# EAGLE board sapflow_v3 (EAGLE 9.5.2)
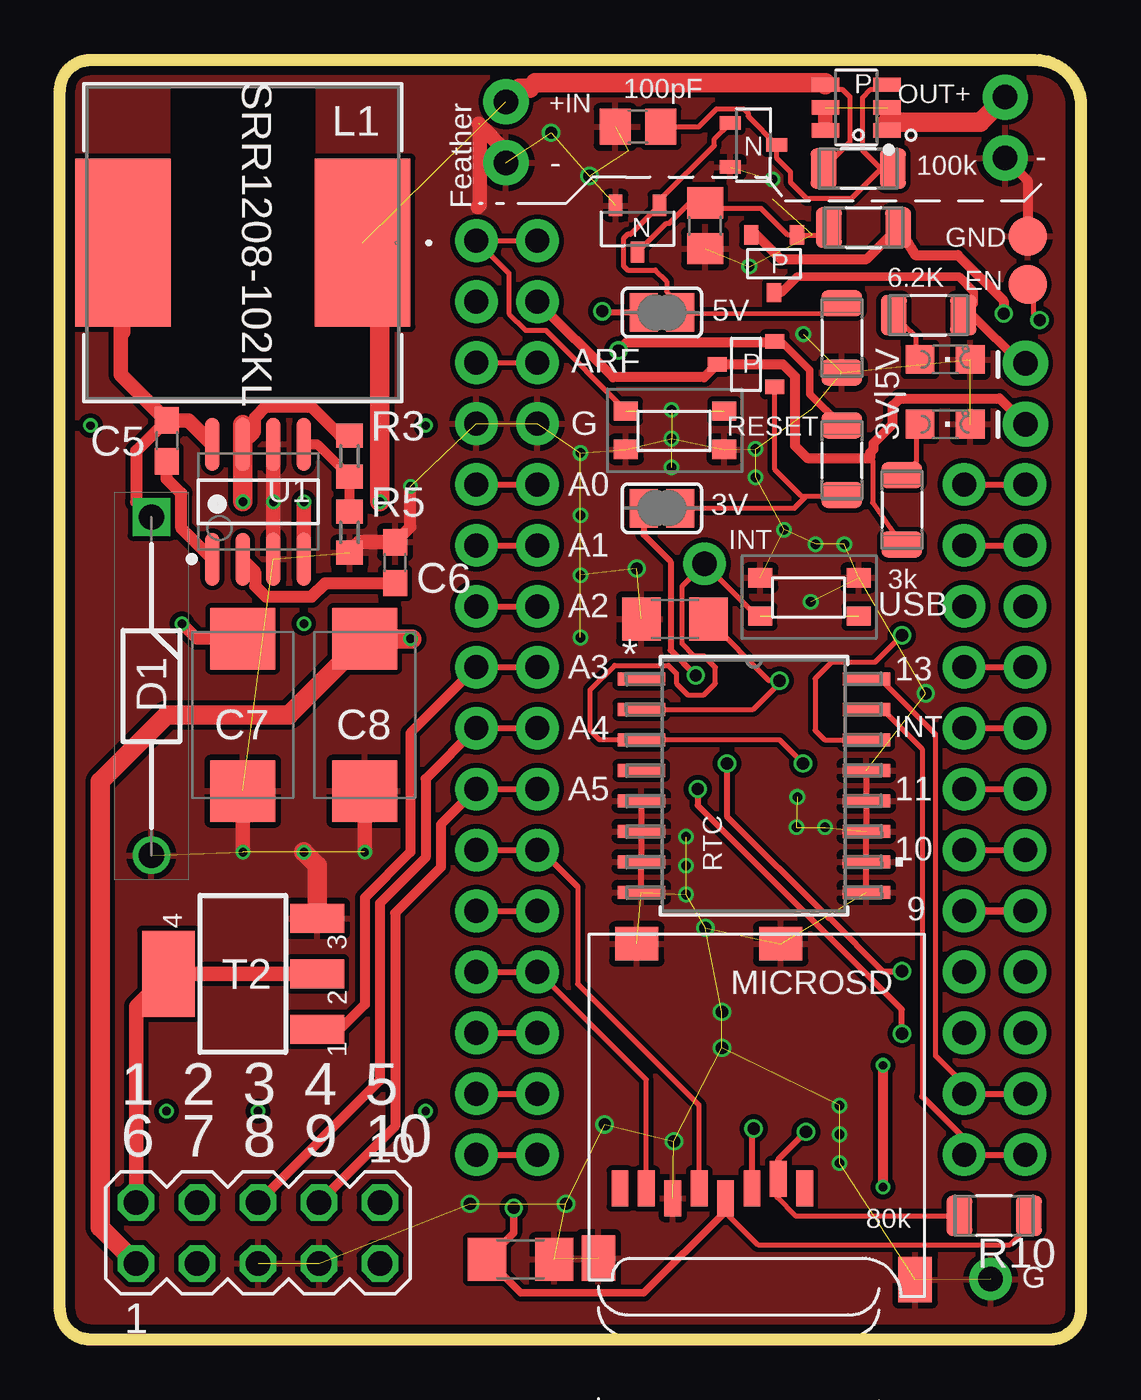
[diagram p0: board, top side]
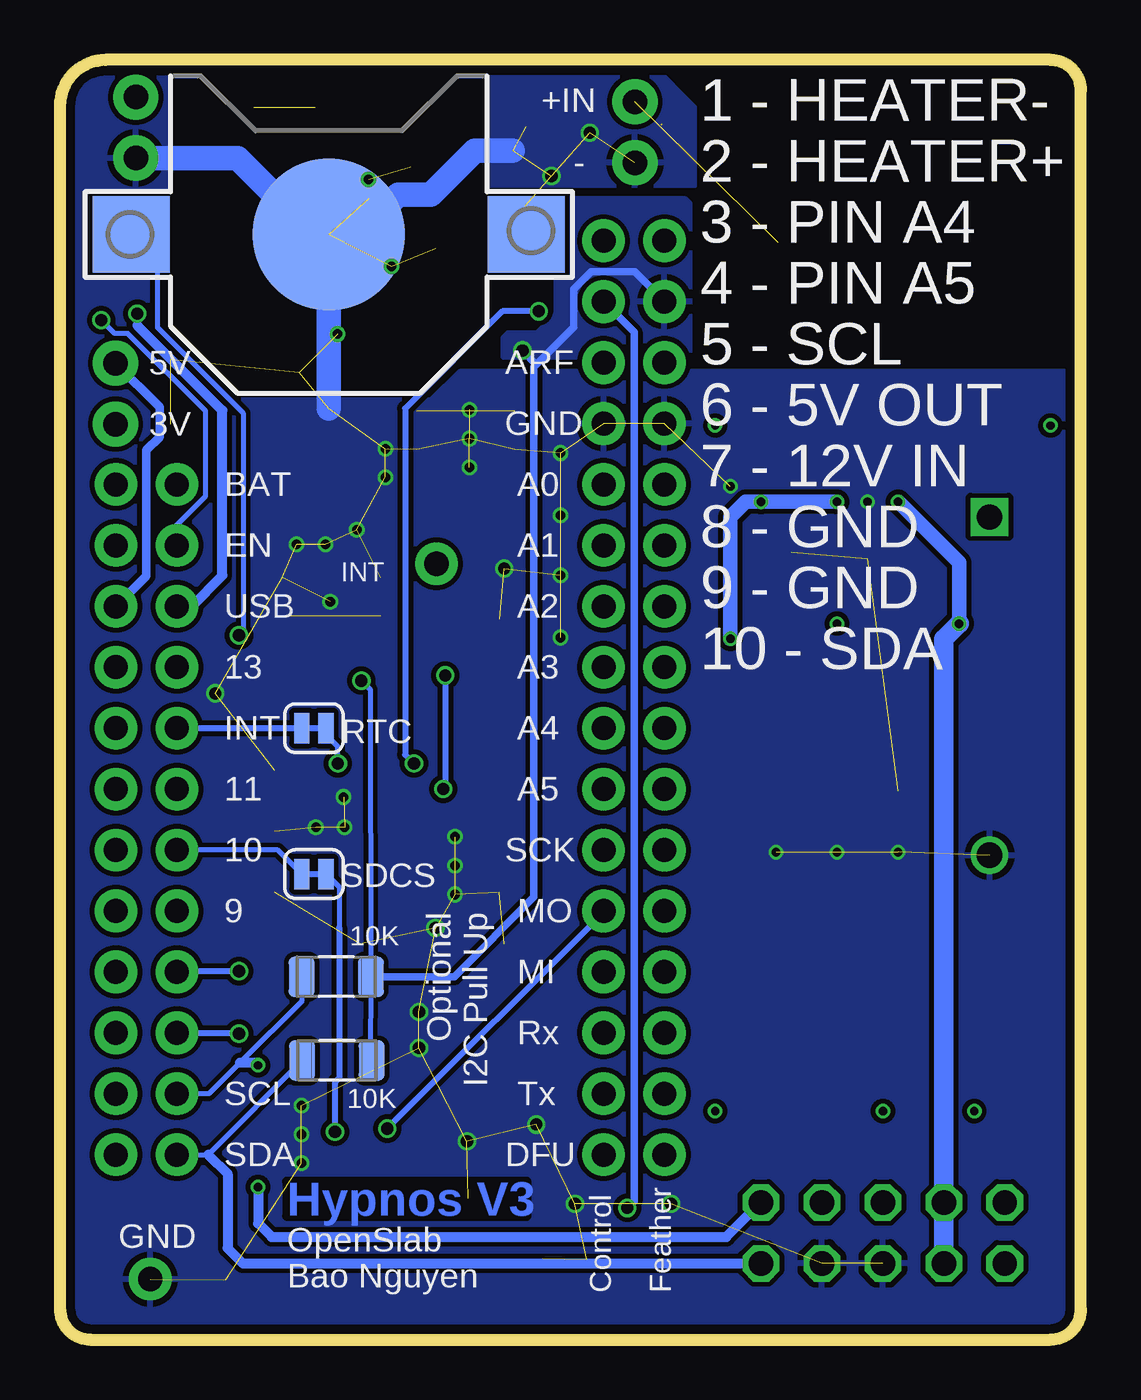
[diagram p1: board, bottom side, seen from below]

Size 42.55 x 53.34 mm. Coordinates in mm from the lower left corner, seen from the top.
Outline: 1.27,53.34 40.64,53.34 arc-90 42.55,51.44 42.55,1.27 arc-90 41.28,0 1.27,0 arc-90 0,1.27 0,52.07 arc-90 1.27,53.34
Copper layers (1*16): Top 0.035559375mm / dielectric 1.6mm / Bottom 0.035559375mm
Design rules "osh_park": minimum track width 6mil, minimum drill 10mil, track to track 6mil, track to pad 6mil, pad to pad 6mil, via to via 6mil, smd to smd 6mil, copper to edge 15mil, drill to drill 6mil, minimum pad ring 5mil, minimum via ring 5mil, stop-mask expansion 2.5mil, vias tented up to drill 0mil, thermal gap 10mil
Net classes: 0 default: clearance 0.205 mm; 1 GND: clearance 0.205 mm to class 0, clearance 0.205 mm; 2 HIGHVOLTAGE: clearance 0.205 mm to class 0, clearance 0.205 mm to class 1, clearance 0.3 mm

## Footprints (pad centres in the part's own frame; a part is rotated, then mirrored left to right if it is on the bottom)
SJ = smd 1.168 x 1.6: 1 -0.762,0; 2 0.762,0
1X02_NO_SILK = drill 1.016 pad 1.88: 1 0,0; 2 2.54,0
CR1220 = smd 3.2 x 3.2: +$1 -8.225,0; +$2 8.225,0 | smd 6.35 x 6.35: - 0,0
C1206 = smd 1.6 x 1.8: 1 -1.4,0; 2 1.4,0
C0805 = smd 1.3 x 1.5: 1 -0.95,0; 2 0.95,0
C0603 = smd 1.1 x 1: 1 -0.85,0; 2 0.85,0
D/7343-31R = smd 2.55 x 2.7: + 3.175,0; - -3.175,0
SMT-JUMPER_2_NC_TRACE_SILK = smd 0.635 x 1.27: 1 -0.508,0; 2 0.508,0
DIOAD1405W86L465D235 = drill 1.05 pad 1.575 square: 1 0,0 | drill 1.05 pad 1.575: 2 14.1,0
1X01-CLEANBIG = drill 1.016 pad 1.778: 1 0,0
IND_BOURNS_SRR1208 = smd 3.988 x 7.01: 1 -4.991,0; 2 4.991,0
CHIPLED_0805 = smd 1.2 x 1.2: A 0,-1.05; C 0,1.05
MICROSD = smd 0.7 x 1.5: 1 9,-10.64; 2 7.9,-10.24; 3 6.8,-10.64; 4 5.7,-11.04; 5 4.6,-10.64; 6 3.5,-11.04; 7 2.4,-10.64; 8 1.3,-10.64 | smd 1.8 x 1.4: CD1 2,-0.44; CD2 8,-0.44 | smd 1.4 x 1.9: MT1 0.4,-13.54; MT2 13.6,-14.44
FEATHERWING = drill 1 pad 1.778: 1 6.35,1.27; 2 8.89,1.27; 3 11.43,1.27; 4 13.97,1.27; 5 16.51,1.27; 6 19.05,1.27; 7 21.59,1.27; 8 24.13,1.27; 9 26.67,1.27; 10 29.21,1.27; 11 31.75,1.27; 12 34.29,1.27; 13 36.83,1.27; 14 39.37,1.27; 15 41.91,1.27; 16 44.45,1.27; 17 44.45,21.59; 18 41.91,21.59; 19 39.37,21.59; 20 36.83,21.59; 21 34.29,21.59; 22 31.75,21.59; 23 29.21,21.59; 24 26.67,21.59; 25 24.13,21.59; 26 21.59,21.59; 27 19.05,21.59; 28 16.51,21.59
SOT-23-3 = smd 0.8 x 0.6: D 1.2,0; G -1.2,0.95; S -1.2,-0.95
SOT23-6 = smd 1.146 x 0.597: 1 -1.287,0.95; 2 -1.287,0; 3 -1.287,-0.95; 4 1.287,-0.95; 5 1.287,0; 6 1.287,0.95
SOT23-S = smd 0.88 x 0.569: 1 -0.975,0.915; 2 -0.975,-0.915; 3 0.975,0
RES_1206 = smd 1.08 x 1.68: 1 -1.445,0; 2 1.445,0
R0603 = smd 1 x 1.1: 1 -0.85,0; 2 0.85,0
21-0042B_16 = smd 1.981 x 0.533: 1 -4.686,4.445; 2 -4.686,3.175; 3 -4.686,1.905; 4 -4.686,0.635; 5 -4.686,-0.635; 6 -4.686,-1.905; 7 -4.686,-3.175; 8 -4.686,-4.445; 9 4.686,-4.445; 10 4.686,-3.175; 11 4.686,-1.905; 12 4.686,-0.635; 13 4.686,0.635; 14 4.686,1.905; 15 4.686,3.175; 16 4.686,4.445
MA05-2 = drill 1.016 octagon: 1 -5.08,-1.27; 2 -5.08,1.27; 3 -2.54,-1.27; 4 -2.54,1.27; 5 0,-1.27; 6 0,1.27; 7 2.54,-1.27; 8 2.54,1.27; 9 5.08,-1.27; 10 5.08,1.27
SOT223 = smd 1.219 x 2.235: 1 -2.311,-3.099; 2 0,-3.099; 3 2.311,-3.099 | smd 3.6 x 2.2: 4 0,3.099
TP16R = smd 1.6 x 1.6: TP 0,0
MAXIM_MAX5033BASA+_1 = smd 2.2 x 0.6: 1 -2.4,1.905; 2 -2.4,0.635; 3 -2.4,-0.635; 4 -2.4,-1.905; 5 2.4,-1.905; 6 2.4,-0.635; 7 2.4,0.635; 8 2.4,1.905
PUSHBUTTON_SMD = smd 1 x 0.8: 1 0,-1.6; 2 4.1,-1.6; 3 0,0; 4 4.1,0

## Placement (x,y rotation side)
3V  [SJ]  25.09,34.66 0 top
3V|5V  [1X02_NO_SILK]  40.23,38.16 90 bottom
5V  [SJ]  25.09,42.82 0 top
+IN  HIGHV-IN  [1X02_NO_SILK]  18.59,49.05 90 top
B1  CR1220  [CR1220]  31.34,46.07 0 bottom
C1  100nF  [C1206]  19.2,3.34 0 top
C2  100pF  [C0805]  26.88,46.43 270 top
C3  100nF  [C1206]  25.62,30.04 180 top
C4  100pF  [C0805]  24.09,50.55 180 top
C5  1uF  [C0603]  4.45,37.47 270 top
C6  0.1uF  [C0603]  13.97,32.39 90 top
C7  47uF  [D/7343-31R]  7.62,26.04 90 top
C8  33uF  [D/7343-31R]  12.7,26.04 90 top
CS  SD Select  [SMT-JUMPER_2_NC_TRACE_SILK]  31.97,19.4 0 bottom
D1  VS-50SQ100  [DIOAD1405W86L465D235]  3.81,34.29 270 top
INT  [1X01-CLEANBIG]  26.86,32.34 0 top
JP1  [1X01-CLEANBIG]  38.78,2.52 0 top
L1  SRR1208-102KL  [IND_BOURNS_SRR1208]  7.62,45.72 180 top
LED1  RED  [CHIPLED_0805]  36.88,40.86 270 top
LED2  RED  [CHIPLED_0805]  36.88,38.16 270 top
MICROSD  MICROSD  [MICROSD]  22.04,16.93 0 top
MS1  FEATHERWING  [FEATHERWING]  18.62,52.16 270 top
MS2  FEATHERWING  [FEATHERWING]  16.09,52.16 270 top
OUT+  HIGHV-OUT  [1X02_NO_SILK]  39.38,49.26 90 top
PMOS1  SSM3J3228R  [SOT-23-3]  29.76,44.85 270 top
PMOS2  SSM3J3228R  [SOT-23-3]  28.59,40.66 180 top
PMOS3  P-MOSFET  [SOT23-6]  33.19,51.36 180 top
Q1  NMOS  [SOT23-S]  24.07,46.3 270 top
Q2  NMOS  [SOT23-S]  28.9,49.8 0 top
R1  30k  [RES_1206]  32.59,41.76 270 top
R2  30k  [RES_1206]  32.59,36.66 90 top
R3  1M  [R0603]  12.07,36.83 90 top
R4  100k  [RES_1206]  33.48,46.36 0 top
R5  384k  [R0603]  12.07,33.66 90 top
R6  10k  [RES_1206]  31.01,11.64 180 bottom
R7  10k  [RES_1206]  31.04,15.12 180 bottom
R8  2k  [RES_1206]  36.2,42.71 0 top
R9  820  [RES_1206]  35.09,34.59 270 top
R10  30k  [RES_1206]  38.93,5.17 180 top
R11  100k  [RES_1206]  33.27,48.81 180 top
RTC  DS3231ST&R  [21-0042B_16]  28.92,23.09 0 top
RTC_INT  [SMT-JUMPER_2_NC_TRACE_SILK]  31.97,25.48 0 bottom
SV1  [MA05-2]  8.26,4.45 0 top
T2  [SOT223]  7.62,15.24 90 top
TP1  TPTP16R  [TP16R]  40.33,43.98 0 top
TP2  TPTP16R  [TP16R]  40.33,45.98 0 top
U1  MAXIM_MAX5033BASA+MAXIM_MAX5033BASA+_0_1  [MAXIM_MAX5033BASA+_1]  8.26,34.93 90 top
U$1  PUSH_BUTTON  [PUSHBUTTON_SMD]  23.59,38.71 0 top
U$2  PUSH_BUTTON  [PUSHBUTTON_SMD]  29.19,31.75 0 top

## Library data of the parts
3V 5V = jumper
3V|5V +IN OUT+ = SparkFun-Connectors
B1 = microbuilder
C1 C3 INT JP1 LED1 LED2 MICROSD MS2 = adafruit
C2 C4 = resistor
C5-C8 = rcl; SPICEPREFIX: C
CS RTC_INT = SparkFun-Jumpers
D1 = VS-50SQ100; ALLIED_NUMBER: 70078786; ALLIED_PRICE-STOCK: http://www.alliedelec.com/vishay-pcs-vs-50sq100/70078786/; DESCRIPTION: VS-50SQ100, Schottky Diode, 5A max, 100V, 2-Pin, DO-204AR; HEIGHT: mm; MANUFACTURER_NAME: Vishay; MANUFACTURER_PART_NUMBER: VS-50SQ100; MOUSER_PART_NUMBER: 844-50SQ100; MOUSER_PRICE-STOCK: https://www.mouser.com/Search/Refine.aspx?Keyword=844-50SQ100; RS_PART_NUMBER: 5446041; RS_PRICE-STOCK: https://uk.rs-online.com/web/p/products/5446041
L1 = SRR1208-102KL; BUILT_BY: EMA_UL_Team; MANUFACTURER_PART_NUMBER: SRR1208-102KL; VENDOR: Bourns Electronics
MS1 = powerboard
PMOS1 PMOS2 = M0_Power
PMOS3 Q1 Q2 U$1 U$2 = eDNA
R1 R2 R4 R6-R11 = Resistor_Capacitor; CREATED_BY: PCBLayout.com; DIGIKEY_PART_NUMBER: WSLP-.05TR-ND; MANUFACTURER: Vishay Dale; MPN: WSLP1206R0500FEA; PACKAGE: SMD 1206
R3 R5 = rcl; SPICEPREFIX: R
RTC = power8; MANUFACTURER_PART_NUMBER: DS3231S#T&R; VENDOR: Maxim Integrated Products
SV1 = con-lstb; OC_FARNELL: unknown; OC_NEWARK: unknown
T2 = zetex; OC_FARNELL: unknown; OC_NEWARK: unknown
TP1 TP2 = testpad
U1 = Maxim - MAX5033BASA+; CIIVA_IDS: 1484514; CODE__IPC: SOIC127P600-8; CODE__JEDEC: MS-012-AA; COMPONENT_LINK_1_DESCRIPTION: Manufacturer URL; COMPONENT_LINK_1_URL: http://www.maxim-ic.com; COMPONENT_LINK_3_DESCRIPTION: Package Specification; COMPONENT_LINK_3_URL: http://pdfserv.maxim-ic.com/package_dwgs/21-0041.PDF; DATASHEET: http://datasheets.maxim-ic.com/en/ds/MAX5033.pdf; DATASHEET_VERSION: Rev 5, May-2011; FOOTPRINT_VARIANT_NAME_0: Level C; FOOTPRINT_VARIANT_NAME_1: Level B; FOOTPRINT_VARIANT_NAME_2: Level A; IMPORTED: yes; IMPORTED_FROM: vault; IMPORT_TS: 1521862065; MF: Maxim; MPN: MAX5033BASA+; PACKAGE: S8+5; PACKAGE_DESCRIPTION: 8-Pin Small-Outline IC, Narrow (0.15in), 1.27 mm Pitch, SOIC (N), Pb-Free; PACKAGE_VERSION: revC, 2010; PREFIX: U; RELEASE_DATE: 1332919945; VAULT_GUID: 1E7CABE1-80B5-44B1-A1B1-D79A0DB0D6E1; VAULT_REVISION: 223A1D72-BB07-4F7F-9695-43D469E578B1

## Nets
0RX: MS1.14 MS2.14
1TX: MS1.15 MS2.15
3VRAIL: 3V|5V.1 C1.1 MICROSD.4 MS1.2 PMOS2.D R9.2 R10.1
5VRAIL: 3V|5V.2 MS1.26 PMOS1.D R8.2
5VUSB: MS2.26 PMOS1.S R4.2
9: MS1.21 MS2.21
11: MS1.23 MS2.23
13: MS1.25 MS2.25
+3V3: C3.1 MS2.2 PMOS2.S R2.2 R6.1 R7.1 RTC.2
+12V: C7.+ R3.2 SV1.3 SV1.4 U1.7
A0: MS1.5 MS2.5
A1: MS1.6 MS2.6
A2: MS1.7 MS2.7
A3: MS1.8 MS2.8 T2.1
A4: MS1.9 MS2.9 SV1.6
A5: MS1.10 MS2.10 SV1.8
ARF: MS1.3 MS2.3
CLK: MICROSD.5 MS1.11 MS2.11
CS: CS.2 MICROSD.2 R10.2
DFU: MS1.16 MS2.16
DI: MICROSD.3 MS1.12 MS2.12
DO: MICROSD.7 MS1.13 MS2.13
EN: MS1.27 MS2.27 TP1.TP
GND [GND]: +IN.1 B1.- C1.2 C2.2 C3.2 C4.2 C6.2 C7.- C8.- D1.2 JP1.1 LED1.C LED2.C MICROSD.6 MICROSD.CD1 MICROSD.CD2 MICROSD.MT1 MICROSD.MT2 MS1.4 MS2.4 OUT+.1 Q1.2 Q2.2 R1.2 R5.1 RTC.5 RTC.6 RTC.7 RTC.8 RTC.9 RTC.10 RTC.11 RTC.12 RTC.13 SV1.5 SV1.7 T2.3 TP2.TP U1.3 U1.6 U$1.1 U$1.2 U$2.3 U$2.4
HEATER-: SV1.2 T2.2 T2.4
HIGHVOLTAGE [HIGHVOLTAGE]: +IN.2 C8.+ L1.1 PMOS3.4 R11.2 SV1.1 U1.4
HIGHVRAIL [HIGHVOLTAGE]: OUT+.2 PMOS3.1 PMOS3.2 PMOS3.5 PMOS3.6
N$1: 5V.1 MS2.20
N$2: B1.+$1 RTC.14
N$3: 3V.1 MS2.19
N$4: 5V.2 Q1.1 Q2.1 R1.1
N$5: 3V.2 PMOS2.G R2.1
N$6: C6.1 U1.2
N$7: MS1.20
N$8: MS1.19
N$9: R3.1 R5.2 U1.5
N$10: C2.1 PMOS1.G Q1.3 R4.1
N$11: CS.1 MS1.22 MS2.22
N$12: LED1.A R8.1
N$13: LED2.A R9.1
N$14: MS1.24 MS2.24 RTC_INT.1
N$15: C4.1 PMOS3.3 Q2.3 R11.1
N$16: C5.2 U1.1
N$17: C5.1 D1.1 L1.2 U1.8
RESET: MS1.1 MS2.1 U$1.3 U$1.4
RTC_INT: INT.1 RTC.3 RTC_INT.2 U$2.1 U$2.2
SCL: MS1.18 MS2.18 R7.2 RTC.16 SV1.10
SDA: MS1.17 MS2.17 R6.2 RTC.15 SV1.9
VBATT: MS1.28 MS2.28

## Tracks (layer width: path | path; a pad name or v marks a point on that pad's centre or on a via)
0RX
  Top 0.254: MS2.14 MS1.14
1TX
  Top 0.254: MS2.15 MS1.15
3VRAIL  (via drill 0.51)
  Top 0.203: R9.2 33.86,34.88 33.86,36.64 33.76,36.75 | MICROSD.4 27.68,5.84 27.68,5.35 29.08,3.95 39.59,3.95 40.35,4.71 R10.1
  Top 0.254: MICROSD.4 27.72,5.92 27.72,5.33
  Top 0.305: 27.72,5.33 24.33,1.94 19.2,1.94 C1.1 18.91,4.45 v18.91,5.49
  Top 0.406: 3V|5V.1 39.16,39.23 34.99,39.23 34.7,38.94 34.7,38.16 33.89,37.35 33.89,37.11 33.76,36.97 33.76,36.75 31.13,36.75 30.63,37.26 30.63,40.15 30.12,40.66 PMOS2.D 26.84,40.11 23.05,40.11 MS1.2
  Bottom 0.305: MS1.2 18.62,41.99 18.62,5.77 v18.91,5.49
5VRAIL
  Top 0.305: 38.09,43.17 R8.2 | PMOS1.D 30.06,43.65
  Top 0.355: 38.09,43.17 38.09,43.69 37.47,44.3 30.72,44.3 30.06,43.65 | 3V|5V.2 40.03,40.7 38.02,42.71 R8.2
  Bottom 0.355: 3V|5V.2 38.4,38.86 38.4,37.62 38.95,37.07 38.95,31.83 MS1.26
5VUSB  (via drill 0.51)
  Top 0.406: v39.33,42.77 39.33,43.3 37.42,45.21 35.63,45.21 R4.2 33.61,45.04 30.04,45.04 29.03,46.05 PMOS1.S
  Bottom 0.305: 39.33,42.28 v39.33,42.77
  Bottom 0.406: MS2.26 37.06,30.57 35.78,31.85 35.78,38.73 39.33,42.28
9
  Top 0.305: MS2.21 MS1.21
11
  Top 0.254: MS2.23 MS1.23
13
  Top 0.254: MS2.25 MS1.25
+3V3  (via drill 0.51)
  Top 0.203: C3.1 27.02,29.98 29.55,27.46 v29.98,27.46 29.98,27.36 28.88,26.26 RTC.2
  Top 0.305: 29.73,41.55 PMOS2.S 30.06,41.61 31.25,40.41 31.25,39.41 R2.2
  Top 0.406: 29.73,41.55 23.59,41.55 v23.27,41.23
  Bottom 0.203: R6.1 29.61,11.66 R7.1 29.61,27.09 v29.98,27.46
  Bottom 0.305: R7.1 26.12,15.12 22.8,18.45 22.8,40.55 22.69,40.65 | 22.69,40.65 v23.27,41.23 | 22.69,40.65 21.14,42.2 21.14,43.78 20.41,44.51 18.6,44.51 MS2.2
  pour Bottom: 16.29,40.96 16.29,47.36 16.48,47.55 21.89,47.55 21.89,42.76 22.69,41.96 23.89,41.96 24.09,41.76 24.09,40.96
+12V  (via drill 0.35)
  Top 0.508: C7.+ 5.72,29.21 v5.08,29.85 | U1.7 8.13,37.84 8.13,38.44 8.58,38.88 10.47,38.88 11.68,37.68 R3.2
  Top 0.61: U1.7 7.62,38.1
  Top 0.813: 7.62,38.14 U1.7 v7.62,34.93
  Bottom 0.61: v5.08,29.85 5.08,32.39 v7.62,34.93
  Bottom 0.813: SV1.3 SV1.4 5.72,29.21 v5.08,29.85
A0
  Top 0.254: MS2.5 MS1.5
A1
  Top 0.254: MS2.6 MS1.6
A2
  Top 0.254: MS2.7 MS1.7
A3
  Top 0.254: MS2.8 MS1.8
  Top 0.406: MS2.8 14.61,25.27 14.61,20.32 12.7,18.41 12.7,13.97 11.66,12.93 T2.1
A4
  Top 0.254: MS2.9 MS1.9
  Top 0.406: MS2.9 15.24,23.37 15.24,20.09 13.34,18.18 13.34,10.8 SV1.6
A5
  Top 0.254: MS2.10 MS1.10
  Top 0.406: MS2.10 15.88,21.46 15.88,19.68 13.97,17.78 13.97,8.89 SV1.8
ARF
  Top 0.203: MS2.3 MS1.3
CLK
  Top 0.203: MICROSD.5 26.63,9.75 21.57,14.82 21.57,18.87
  Top 0.254: 21.57,18.87 20.04,20.4 MS1.11 MS2.11
CS  (via drill 0.51)
  Top 0.203: MICROSD.2 29.88,6.64 29.88,5.92 30.63,5.17 R10.2
  Top 0.254: v31.09,8.66 29.94,7.5 MICROSD.2
  Bottom 0.203: CS.2 30.91,18.86 30.91,17.18
  Bottom 0.254: v31.09,8.66 31.09,10.73 30.91,10.91 30.91,17.18
DFU
  Top 0.254: MS2.16 MS1.16
DI  (via drill 0.51)
  Top 0.254: v28.91,8.8 28.84,8.73 MICROSD.3 | MS2.12 MS1.12
  Bottom 0.254: v28.91,8.8 19.9,17.8 MS1.12
DO
  Top 0.203: MS1.13 19.94,15.32 | MICROSD.7 24.44,10.82 20.09,15.16
  Top 0.254: MS2.13 19.94,15.32 20.09,15.16
EN  (via drill 0.51)
  Top 0.203: v40.82,42.5 40.57,42.75 40.57,43.49 40.29,43.77 40.29,43.98 TP1.TP
  Top 0.254: MS2.27 MS1.27
  Bottom 0.203: v40.82,42.5 40.26,41.94 39.72,41.94 36.48,38.7 36.48,35.15 37.68,33.96 MS2.27
GND  (via drill 0.35, 0.4, 0.51)  (69 unrouted)
  Top 0.254: RTC.8 RTC.7 RTC.6 RTC.5 | RTC.9 RTC.10 RTC.11 RTC.12 RTC.13
  Top 0.406: OUT+.1 40.33,48.32 TP2.TP
  Top 0.508: C6.2 14.61,33.87 v14.61,35.56
  Top 0.61: R5.1 12.5,33.23 C6.2 | C7.- v7.62,20.32 | C8.- v12.7,20.32 | +IN.1 18.59,49.55 17.44,50.69 | 17.41,47.2 17.49,47.29 17.49,50.64 | U1.6 v8.89,34.93 U1.3
  Top 0.813: T2.3 10.72,19.76 v10.16,20.32
  Bottom 0.406: v29.69,48.36 29.69,47.55
  Bottom 0.813: 30.09,47.32 B1.- 31.95,46.07
  Bottom 1.016: B1.- 31.34,38.82 | 30.09,47.32 29.24,47.32 29.05,47.12 28.45,47.72 27.1,47.72 25.26,49.55 23.69,49.55 | 31.95,46.07 35.13,49.26 OUT+.1
  other vias: 25.59,8.27 30.73,22.61 30.18,33.76 26.9,17.15 20.47,50.3 36.08,26.93 22.7,8.96 27.59,13.65 21.09,5.66 17.09,5.66 24.04,32.14 27.59,12.16 28.98,37.12 28.98,35.95 28.73,44.73 25.48,38.76 25.48,37.55 25.48,36.36 30.69,21.36 31.88,21.36 31.48,33.16 32.69,33.16 31.29,30.75 26.09,20.95 26.09,19.75 26.09,18.55 32.48,9.75 32.48,8.55 32.48,7.35 30.98,41.92 22.07,48.51 21.69,34.36 21.69,36.96 21.69,31.86 21.69,29.26
  pour Top: 0.35,53.16 42.09,53.16 42.09,0.16 0.35,0.16
  pour Bottom: 0.11,40.36 25.88,40.36 27.09,39.16 35.09,39.16 38.09,42.16 38.09,52.66 42.09,52.66 42.09,0.16 0.11,0.16
  pour Bottom: 16.09,48.12 16.09,51.36 17.89,53.16 24.48,53.16 24.69,52.96 24.69,48.16 24.65,48.12
HEATER-
  Top 0.61: T2.4 T2.2 | T2.4 4.52,13.89 | SV1.2 3.18,13.89 T2.4
HIGHVOLTAGE  (via drill 0.35)  (1 unrouted)
  Top 0.203: PMOS3.4 32.08,52.12 32.61,52.12 32.91,51.82 32.91,49.92 31.85,48.86 R11.2
  Top 0.61: C8.+ 13.34,29.85 | U1.4 v10.16,34.93
  Top 0.813: +IN.2 19.15,52.16 19.57,52.16 19.81,52.4 31.9,52.4 PMOS3.4 | L1.1 13.34,45 v13.34,34.93 | 14.66,29.21 v14.61,29.21 C8.+ 9.53,26.04 4.45,26.04 1.68,23.27 1.68,4.67 SV1.1
  Bottom 0.61: v14.61,29.21 14.61,34.29 13.97,34.93 v13.34,34.93 v10.16,34.93
HIGHVRAIL  (1 unrouted)
  Top 0.61: PMOS3.1 34.47,50.76 PMOS3.2 34.52,51.31 | PMOS3.5 PMOS3.6
  Top 0.813: OUT+.2 38.34,50.76 34.47,50.76
N$1  (via drill 0.51)
  Top 0.254: v35.09,15.36 34.29,15.36 32.07,17.57 32.04,17.57 27.8,21.81 v27.8,24.02 | 5V.1 22.65,42.82 v22.6,42.86
  Bottom 0.254: v22.6,42.86 24.11,42.86 28.16,38.81 28.16,24.38 v27.8,24.02 | v35.09,15.36 37.65,15.36 MS2.20
N$2  (via drill 0.51)
  Top 0.203: RTC.14 31.87,24.99 31.47,25.39 31.47,27.55 32.15,28.23 33.96,28.23 v35.09,29.36
  Bottom 0.203: v35.09,29.36 34.91,29.53 34.91,38.62 38.49,42.2 38.49,44.98 B1.+$1
N$3  (via drill 0.51)
  Top 0.254: 3V.1 24.32,33.55 25.45,32.43 25.45,28.73 v26.49,27.68 | v35.09,12.75 35.09,13.75 26.58,22.27 v26.58,22.95
  Bottom 0.254: v26.49,27.68 26.49,23.04 v26.58,22.95 | v35.09,12.75 37.65,12.75 MS2.19
N$4
  Top 0.203: R1.1 32.59,43.17 32.18,42.76 25.92,42.74 5V.2 25.8,42.87 25.8,43.17 25.28,43.69 25.28,44.11 24.81,44.58 23.65,44.58 23.48,44.76 23.48,45.89 23.65,46.07 23.78,46.07 Q1.1 24.98,47.49 27.27,49.78 27.27,50.05 Q2.1
N$5
  Top 0.203: 31.11,35.16 30.9,35.16 29.79,36.27 PMOS2.G | 31.11,35.16 32.51,35.16 R2.1 | 31.11,35.16 30.61,34.66 3V.2
N$6
  Top 0.508: U1.2 8.13,32.01 8.13,31.41 8.58,30.97 10.47,30.97 11.04,31.54 C6.1
N$9
  Top 0.406: U1.5 10.72,37.33 R3.1 R5.2
N$10
  Top 0.203: R4.1 32.18,46.05 PMOS1.G 30.34,46.05 29.23,47.15 27.12,47.15 26.9,47.37 | 26.9,47.37 C2.1 | Q1.3 25.27,46.53 25.39,46.53 26.23,47.37 26.9,47.37
N$11
  Top 0.254: MS2.22 MS1.22
  Bottom 0.203: CS.1 33.47,20.4 MS2.22
N$12
  Top 0.203: LED1.A 35.66,41.03 35.66,41.82 R8.1
N$13
  Top 0.203: R9.1 35.69,36.61 35.69,38.01 LED2.A
N$14
  Top 0.254: MS2.24 MS1.24
  Bottom 0.254: MS2.24 RTC_INT.1
N$15
  Top 0.203: PMOS3.3 34.27,52.1 33.77,52.1 33.45,51.78 33.45,49.57 34.2,48.81 R11.1 34.23,48.81 32.98,47.56 31.12,47.56 30.44,48.23 30.44,48.67 29.87,49.24 Q2.3 28.67,51 28.67,51.12 28.49,51.3 27.36,51.3 26.62,50.55 C4.1
N$16
  Top 0.508: U1.1 5.06,33.82 5.06,35.27 4.45,35.88 C5.2
N$17
  Top 0.508: C5.1 3.18,37.05 3.18,34.93 D1.1
  Top 0.61: U1.8 5.36,38.32 C5.1 2.54,40.22 2.54,41.91 | 2.54,41.91 2.54,43.18 | L1.2 2.63,42 2.54,41.91
N$18  (via drill 0.35)
  other vias: 8.26,9.52
N$19  (via drill 0.35)
  other vias: 10.16,29.85
N$20  (via drill 0.35)
  other vias: 1.27,38.1
N$21  (via drill 0.35)
  other vias: 15.24,38.1
N$22  (via drill 0.35)
  other vias: 15.24,9.52
N$23  (via drill 0.35)
  other vias: 4.45,9.52
RESET  (1 unrouted)
  Top 0.203: MS1.1 MS2.1 18.7,44.46 18.7,42.77 19.4,42.07 20.25,42.07 23.59,38.73 U$1.3
RTC_INT  (via drill 0.51)  (1 unrouted)
  Top 0.203: v30.97,24.02 29.99,24.99 RTC.3 22.49,24.99 22.09,25.39 22.09,27.09 23.11,28.11 25.35,28.11 25.68,27.77 25.68,27.35 26.16,26.87 26.83,26.87 27.31,27.35 27.31,28.02 26.83,28.5 26.43,28.5 25.92,29.01 25.92,31.4 INT.1 27.95,31.24 29.04,30.15 U$2.1 | 33.31,30.13 U$2.2
  Bottom 0.203: RTC_INT.2 31.46,25.2 30.97,24.71 v30.97,24.02
SCL  (via drill 0.35)
  Top 0.203: RTC.16 33.66,27.47 34.25,27.47 36.48,25.25 36.48,11.84 37.47,10.85
  Top 0.254: MS1.18 MS2.18 37.68,10.64 37.47,10.85
  Top 0.406: v34.29,11.43 v34.29,6.35
  Bottom 0.203: R7.2 32.46,14.12 35.04,11.54 36.34,10.25 MS2.18
  Bottom 0.406: 35.04,11.54 34.4,11.54 v34.29,11.43 | v34.29,6.35 34.29,4.83 33.73,4.27 14.78,4.27 SV1.10
SDA
  Top 0.203: RTC.15 34.29,26.26 35.93,24.62 35.93,10.13
  Top 0.254: MS1.17 MS2.17 37.68,8.38 35.93,10.13
  Bottom 0.203: R6.2 36.36,7.71 MS2.17
  Bottom 0.406: 36.36,7.71 35.56,6.91 35.56,3.81 34.93,3.17 SV1.9
VBATT
  Top 0.254: MS2.28 MS1.28

## Text on the board
Bottom: Hypnos V3
tPlace: 100pF | P | N | - | 100k | - | Feather | N | GND | P | 6.2K | EN | ARF | P | RESET | G | A0 | A1 | 3k | A2 | A3 | A4 | A5 | 80k | G
bPlace: +IN | - | ARF | 5V | GND | 3V | A0 | BAT | A1 | EN | INT | A2 | USB | A3 | 13 | RTC | A4 | INT | A5 | 11 | SCK | SDCS | 10 | MO | Optional / I2C Pull Up | 9 | 10K | MI | Rx | Tx | 10K | SCL | DFU | SDA | OpenSlab | GND | Feather | Control | Bao Nguyen
tNames: USB | 13 | INT | 11 | 10 | 9 | 1 | 2 | 3 | 4 | 5 | 6 | 7 | 8 | 9 | 10
bNames: 1 - HEATER- | 2 - HEATER+ | 3 - PIN A4 | 4 - PIN A5 | 5 - SCL | 6 - 5V OUT | 7 - 12V IN | 8 - GND | 9 - GND | 10 - SDA
bStop: Hypnos V3